# Altium PCB MS-002.24T003末端灯板PCB图 V1.0.PcbDoc
Units mil, origin at the board's own origin, x right, y up, seen from the top; angles counter-clockwise.
Board outline 2629.92 x 2629.92 mil, 2 copper layers (Top Layer, Bottom Layer), stack 61.756 mil thick; 61 components, 49 nets, 157 pads, 60 vias.
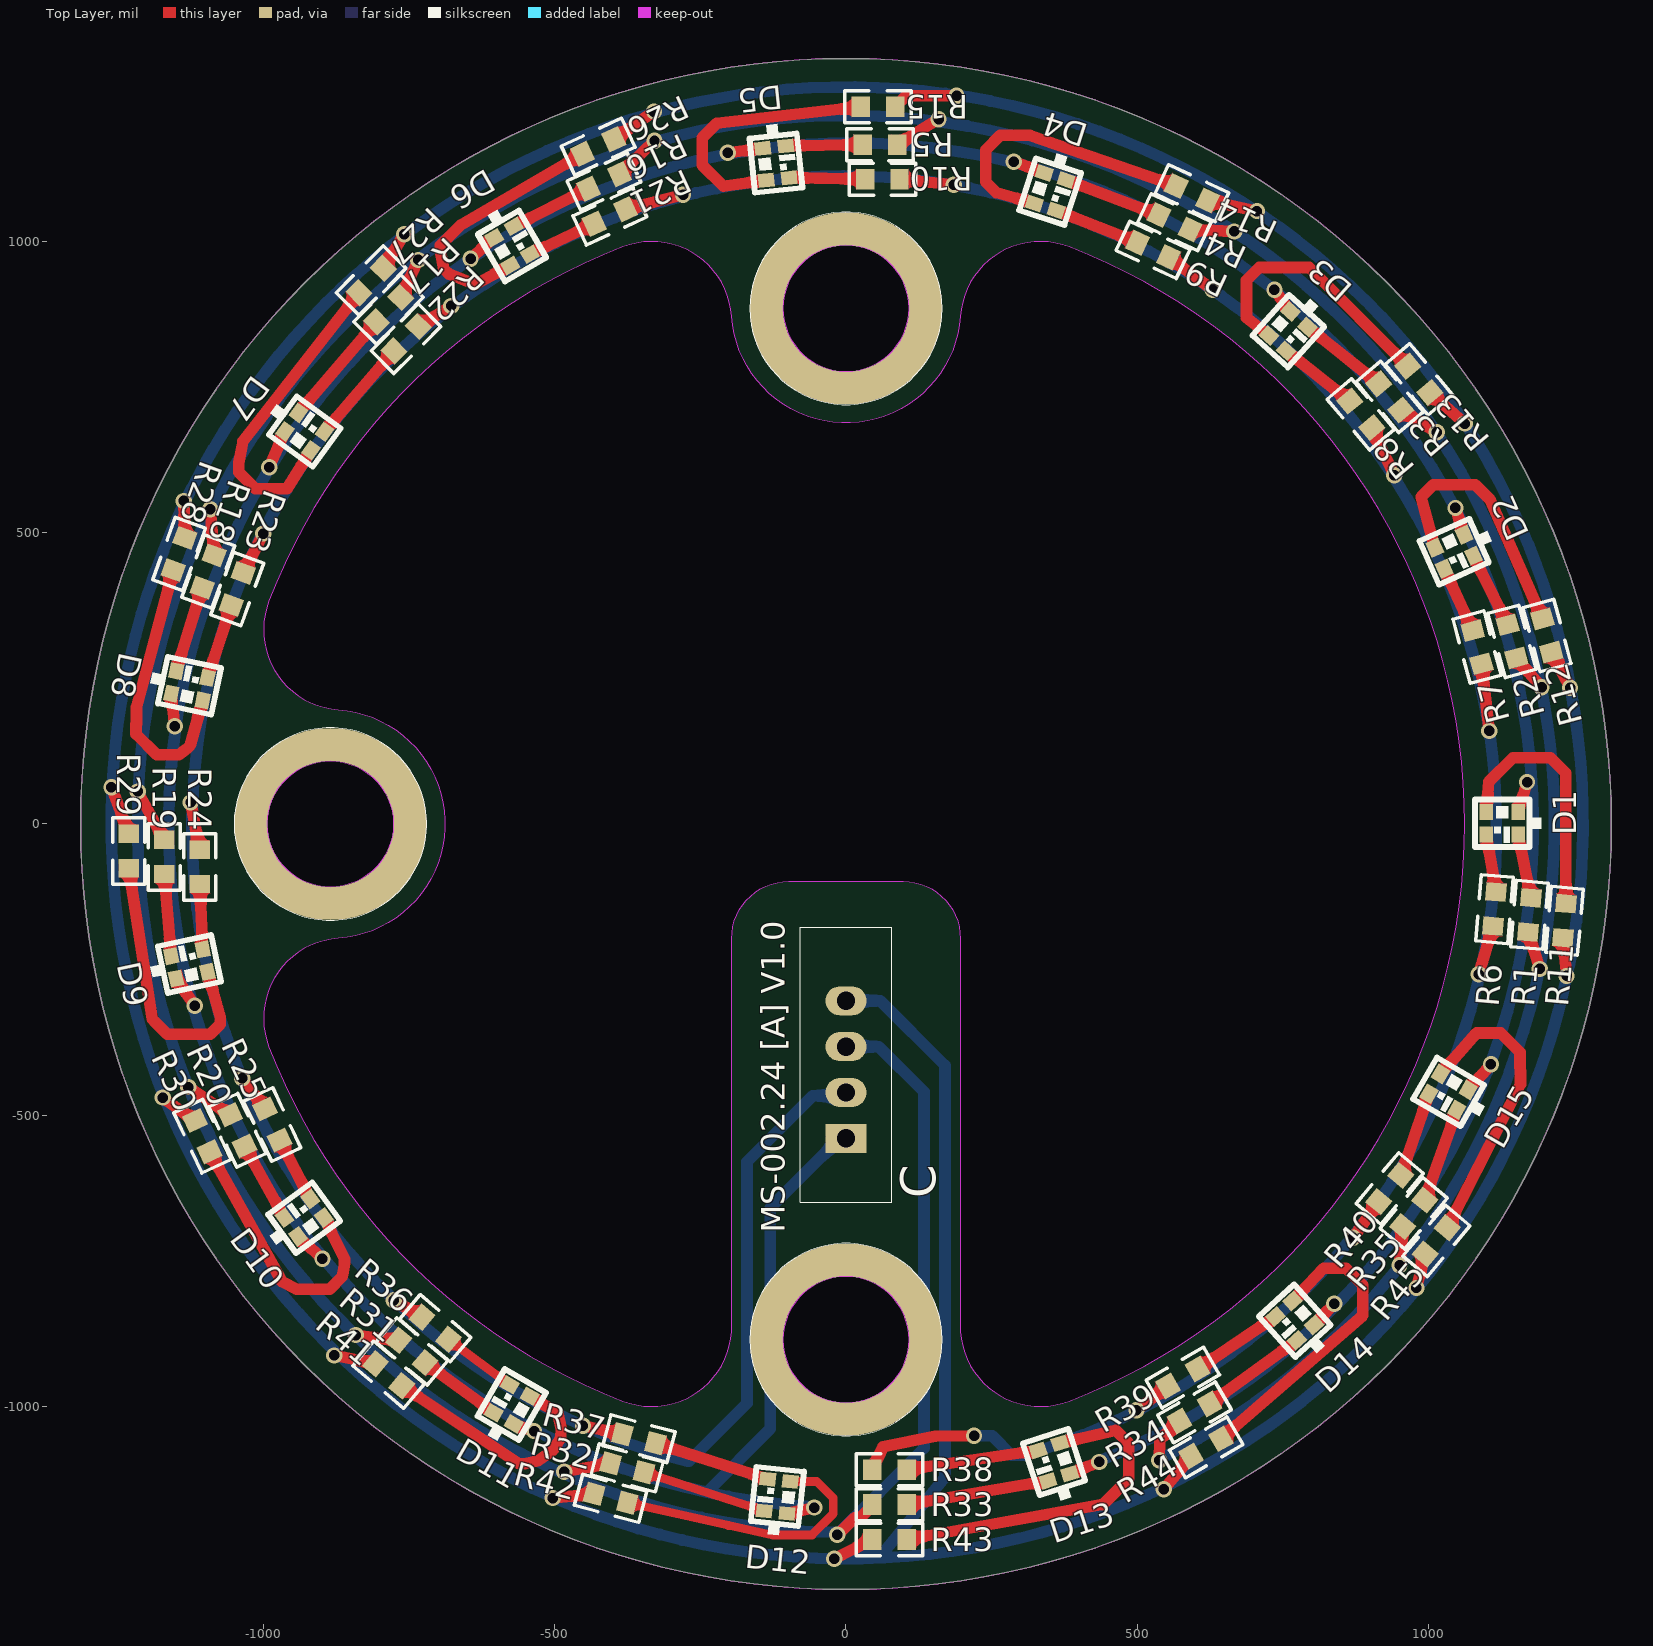
[diagram p0: Top Layer view]
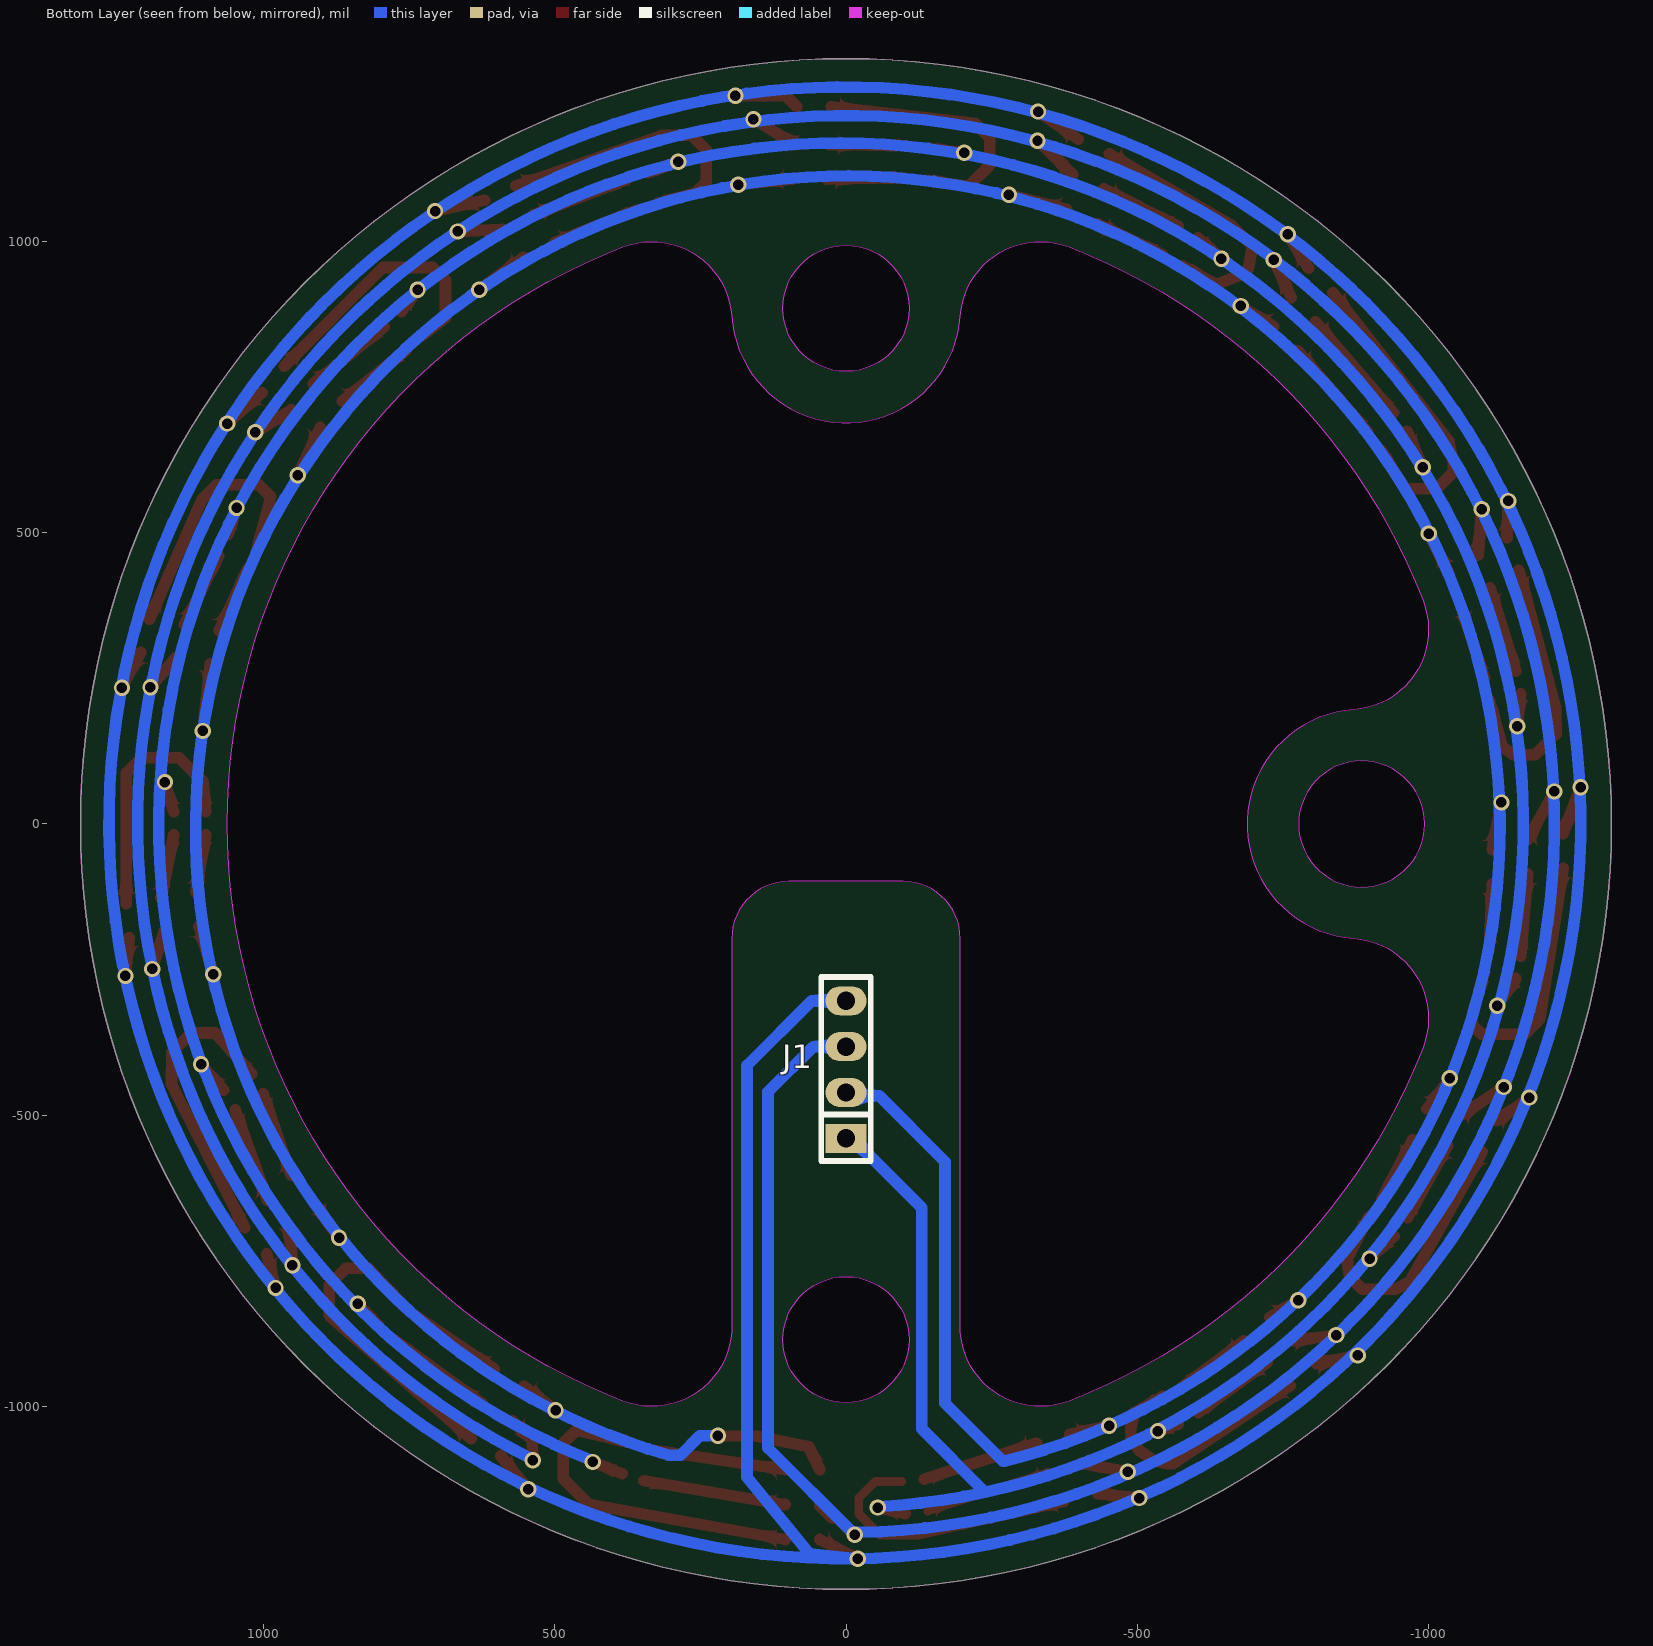
[diagram p1: Bottom Layer view, seen from below]
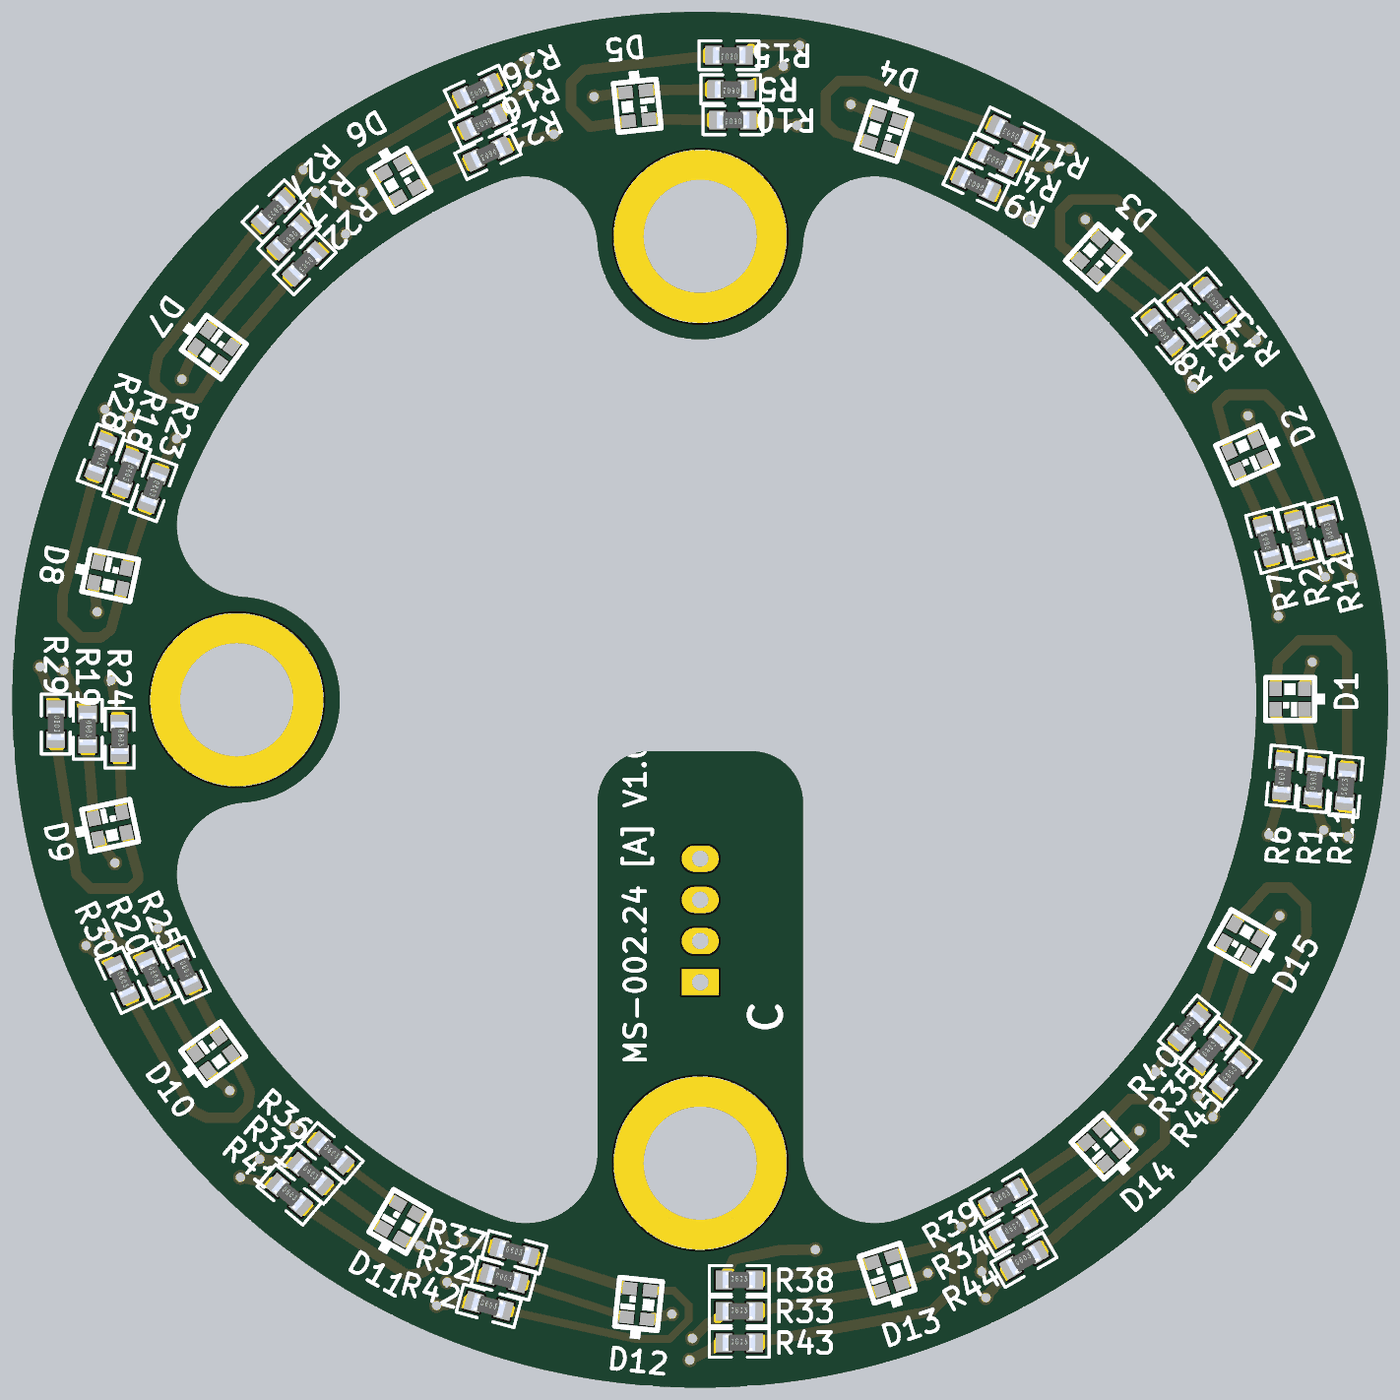
[diagram p2: 3D render of the assembled board from above, using the file's embedded part models]

## Layer stack, top to bottom
Top Solder: solder mask 1, SM-001, Dk 4
Top Layer: signal copper 1.378
Dielectric 1: core 59, Core-043, Dk 4.3
Bottom Layer: signal copper 1.378
Bottom Solder: solder mask 1, SM-001, Dk 4

## Board outline
-1314.96,0 ccw(c0,0) 0,-1314.96 ccw(c0,0) 1314.96,0 ccw(c0,0) 0,1314.96 ccw(c0,0)
cut-out: -991.37,-383.58 ccw(c0,0) -383.58,-991.37 ccw(c-333.86,-862.86) -196.39,-872.32 -196.39,-196.85 cw(c-97.96,-196.85) -97.96,-98.43 97.96,-98.43 cw(c97.96,-196.85) 196.39,-196.85 196.39,-872.32 ccw(c333.86,-862.86) 383.58,-991.37 ccw(c0,0) 383.58,991.37 ccw(c333.86,862.86) 196.39,872.32 cw(c0,885.83) -196.39,872.32 ccw(c-333.86,862.86) -383.58,991.37 ccw(c0,0) -991.37,383.58 ccw(c-862.86,333.86) -872.32,196.39 cw(c-885.83,0) -872.32,-196.39 ccw(c-862.86,-333.86)
cut-out: -108.27,885.83 ccw(c0,885.83) 0,777.56 ccw(c0,885.83) 108.27,885.83 ccw(c0,885.83) 0,994.09 ccw(c0,885.83)
cut-out: -108.27,-885.83 ccw(c0,-885.83) 0,-994.09 ccw(c0,-885.83) 108.27,-885.83 ccw(c0,-885.83) 0,-777.56 ccw(c0,-885.83)
cut-out: -994.09,0 cw(c-885.83,0) -885.83,108.27 cw(c-885.83,0) -777.56,0 cw(c-885.83,0) -885.83,-108.27 cw(c-885.83,0)

## Design rules (kind name [scope] priority, off if disabled: settings)
Clearance [All] p1: gap=8 ignorepadtopadclearanceinfootprint=FALSE
HoleSize [All] p1: absolutevalues=TRUE maxlimit=236.22 minlimit=1 maxpercent=80.000 minpercent=20.000
MinimumSolderMaskSliver [All] p1: minsoldermaskwidth=0
PlaneConnect [All] p1: pad.planeconnectstyle=Relief pad.reliefexpansion=20 pad.reliefentries=4 pad.reliefconductorwidth=10 pad.reliefairgap=10 via.planeconnectstyle=Direct via.reliefexpansion=20 via.reliefentries=4 via.reliefconductorwidth=10 via.reliefairgap=10
PolygonConnect [All] p1: thpad.connectstyle=Relief thpad.reliefconductorwidth=10 thpad.reliefentries=4 thpad.polygonreliefangle="90 Angle" thpad.airgapwidth=10 smdpad.connectstyle=Relief smdpad.reliefconductorwidth=10 smdpad.reliefentries=4 smdpad.polygonreliefangle="90 Angle" smdpad.airgapwidth=10 via.connectstyle=Direct via.reliefconductorwidth=10 via.reliefentries=4 via.polygonreliefangle="90 Angle" via.airgapwidth=10
RoomDefinition MS-002.24T002 [InComponentClass('MS-002.24T002')] p1: confinementstyle=ConfineOut formatcopy=TRUE lockcomponents=FALSE outline 304,-749 590,-749 590,-601.77 304,-601.77
RoutingVias [All] p1: holewidth=18 width=25 viastyle="Through Hole" minholewidth=18 minwidth=25 maxholewidth=28 maxwidth=50
SilkToSilkClearance [All] p1: silktosilkclearance=0
SilkToSolderMaskClearance [IsPad] p1: minsilkscreentomaskgap=0 clearancetoexposedcopper=TRUE
SolderMaskExpansion [IsVia] p1: expansion=4 istentingtop=TRUE
SolderMaskExpansion SolderMaskExpansion_1 [All] p2: expansion=4 istentingtop=FALSE
Width [All] p1: maxlimit=30 minlimit=10 preferedwidth=15
25 further rules are at their usual default settings.

## Components (designator, comment, footprint, x,y, rotation, side; value= is the part's Value field where it differs from the comment)
D1 "19-237A/BHR6GHC-A01/2T" 19-237A/BHR6GHC-A01/2T 1127.56,1.32 r0 top
D2 "19-237A/BHR6GHC-A01/2T" 19-237A/BHR6GHC-A01/2T 1044.82,467.77 r24 top
D3 "19-237A/BHR6GHC-A01/2T" 19-237A/BHR6GHC-A01/2T 759.93,846.69 r48 top
D4 "19-237A/BHR6GHC-A01/2T" 19-237A/BHR6GHC-A01/2T 350.8,1086.29 r72 top
D5 "19-237A/BHR6GHC-A01/2T" 19-237A/BHR6GHC-A01/2T -120.3,1135.47 r96 top
D6 "19-237A/BHR6GHC-A01/2T" 19-237A/BHR6GHC-A01/2T -573.83,993.03 r120 top
D7 "19-237A/BHR6GHC-A01/2T" 19-237A/BHR6GHC-A01/2T -929.87,674.27 r144 top
D8 "19-237A/BHR6GHC-A01/2T" 19-237A/BHR6GHC-A01/2T -1127.95,237.52 r168 top
D9 "19-237A/BHR6GHC-A01/2T" 19-237A/BHR6GHC-A01/2T -1128.05,-240.48 r192 top
D10 "19-237A/BHR6GHC-A01/2T" 19-237A/BHR6GHC-A01/2T -930.87,-676.27 r216 top
D11 "19-237A/BHR6GHC-A01/2T" 19-237A/BHR6GHC-A01/2T -574.27,-997.29 r240 top
D12 "19-237A/BHR6GHC-A01/2T" 19-237A/BHR6GHC-A01/2T -118,-1155 r264 top
D13 "19-237A/BHR6GHC-A01/2T" 19-237A/BHR6GHC-A01/2T 357.24,-1096.13 r288 top
D14 "19-237A/BHR6GHC-A01/2T" 19-237A/BHR6GHC-A01/2T 771.07,-853.31 r312 top
D15 "19-237A/BHR6GHC-A01/2T" 19-237A/BHR6GHC-A01/2T 1035.29,-460.27 r330 top
J1 "4PIN" SIP4_2.0 0,-540 r270 bottom
R1 "1k" 0603_R 1174.2,-156.21 r85 top
R2 "1k" 0603_R 1144.2,313.79 r105 top
R3 "1k" 0603_R 934.2,733.79 r130 top
R4 "1k" 0603_R 564.2,1033.79 r155 top
R5 "1k" 0603_R 58.5,1167 r180 top
R6 "1k" 0603_R 1114.2,-146.21 r85 top
R7 "1k" 0603_R 1084.2,303.79 r105 top
R8 "1k" 0603_R 884.2,703.79 r130 top
R9 "1k" 0603_R 527.46,986.26 r155 top
R10 "1k" 0603_R 62.5,1108 r180 top
R11 "1k" 0603_R 1234.2,-166.21 r85 top
R12 "1k" 0603_R 1204.2,323.79 r105 top
R13 "1k" 0603_R 984.2,763.79 r130 top
R14 "1k" 0603_R 594.2,1083.79 r155 top
R15 "1k" 0603_R 55,1232 r180 top
R16 "1k" 0603_R -415.8,1103.79 r205 top
R17 "1k" 0603_R -785.8,883.79 r225 top
R18 "1k" 0603_R -1095.8,433.79 r250 top
R19 "1k" 0603_R -1171,-56.5 r270 top
R20 "1k" 0603_R -1045.8,-526.21 r295 top
R21 "1k" 0603_R -405.8,1043.79 r205 top
R22 "1k" 0603_R -755.8,833.79 r225 top
R23 "1k" 0603_R -1045.8,403.79 r250 top
R24 "1k" 0603_R -1110,-73.5 r270 top
R25 "1k" 0603_R -985.8,-516.21 r295 top
R26 "1k" 0603_R -425.8,1163.79 r205 top
R27 "1k" 0603_R -815.8,933.79 r225 top
R28 "1k" 0603_R -1145.8,463.79 r250 top
R29 "1k" 0603_R -1232,-46.5 r270 top
R30 "1k" 0603_R -1105.8,-536.21 r295 top
R31 "1k" 0603_R -745.8,-906.21 r320 top
R32 "1k" 0603_R -375.8,-1106.21 r345 top
R33 "1k" 0603_R 74.7,-1169.21 r0 top
R34 "1k" 0603_R 598.65,-1010.96 r30 top
R35 "1k" 0603_R 975.24,-668.81 r50 top
R36 "1k" 0603_R -705.8,-866.21 r320 top
R37 "1k" 0603_R -355.8,-1056.21 r345 top
R38 "1k" 0603_R 74.7,-1109.21 r0 top
R39 "1k" 0603_R 578.65,-950.96 r30 top
R40 "1k" 0603_R 934.2,-626.21 r50 top
R41 "1k" 0603_R -785.8,-946.21 r320 top
R42 "1k" 0603_R -404.3,-1158.58 r345 top
R43 "1k" 0603_R 74.7,-1229.21 r0 top
R44 "1k" 0603_R 618.65,-1070.96 r30 top
R45 "1k" 0603_R 1014.2,-716.21 r50 top

## Footprints (in the part's own frame and the unit in brackets; to place one, negate y for a bottom-side part, rotate by r counter-clockwise, add the part's x,y. Pads: shape width x height; smd on the part's side, far side on the other; paste and mask are expansions set on the pad)
19-237A/BHR6GHC-A01/2T [mm] "RGB三色灯/共阳极"
  rect 0.6x0.7 smd paste+0 mask+0.051: 1(0.7,-0.5) 2(-0.7,-0.5) 3(0.7,0.5) 4(-0.7,0.5)
  silkscreen extent -1.19,-1.04 1.7,1.04
0603_R [mm]
  rect 0.8x0.9 smd: 1(-0.749,0) 2(0.749,0)
  silkscreen extent -1.45,-0.7 1.45,0.7, body extent -0.81,-0.4 0.79,0.4, height 0.42
SIP4_2.0 [mm]
  rect 1.27x1.8 hole 0.8: 1(0,0)
  oval 1.27x1.8 hole 0.8: 2(-2,0) 3(-4,0) 4(-6,0)
  silkscreen extent -7.04,-1.08 0.99,1.08

## Part data
D1 D2 D3 D4 D5 D6 D7 D8 D9 D10 D11 D12 D13 D14 D15: "RGB三色灯/共阳极"
R1 R2 R3 R4 R5 R6 R7 R8 R9 R10 R11 R12 R13 R14 R15 R16 R17 R18 R19 R20 R21 R22 R23 R24 R25 R26 R27 R28 R29 R30 R31 R32 R33 R34 R35 R36 R37 R38 R39 R40 R41 R42 R43 R44 R45: library part RES

## Free pads (board coordinates)
  round 330.71 / inner round 330.71 / far side round 0 hole 216.54: 3(-885.83,0) 3(0,-885.83) 3(0,885.83)

## Via types
v1: diameter 28, hole 18, Top Layer to Bottom Layer, tented both sides, 60 vias

## Nets (pads, with @x,y where several pads share a name; then routed paths per layer and width w, separated by ;. In a path a pad name is that pad's centre, name@x,y a point inside that pad or via, vN(x,y) a via of type N, cw(c..) or ccw(c..) an arc to the next point about the centre after c; other vN are vias at no path point)
B: J1.4 R11.1 R12.1 R13.1 R14.1 R15.1 R26.1 R27.1 R28.1 R29.1 R30.1 R41.1 R42.1 R43.1 R44.1 R45.1 | length 10255.9
  Top Layer w20: v1(-1262,63) R29.1 ; v1(-1174,-470) R30.1 ; v1(-1138,555) R28.1 ; v1(-879,-913) R41.1 ; R27.1 v1(-759,1013) ; v1(-504,-1158) R42.1 ; R26.1 v1(-330,1224) ; v1(-20,-1262.13) R43.1 ; R15.1 103.5,1251 v1(190,1251) ; v1(546,-1143) R44.1 ; R14.1 v1(706,1053) ; v1(980,-797) R45.1 ; R13.1 v1(1063,688) ; R12.1 v1(1244,234) ; R11.1 v1(1238,-261)
  Bottom Layer w20: v1(-20,-1262.13) 54.25,-1254.72 62.5,-1253.9 170,-1122.56 170,-415 58.78,-303.78 J1.4 ; 143.77,-1254.34 cw(c1.96,1.96) 143.93,-1254.32
G: J1.2 R6.1 R7.1 R8.1 R9.1 R10.1 R21.1 R22.1 R23.1 R24.1 R25.1 R36.1 R37.1 R38.1 R39.1 R40.1 | length 8680.9
  Top Layer w20: v1(-1126,37) R24.1 ; v1(-1037,-437) R25.1 ; R23.1 v1(-1001,499) ; v1(-777,-818) R36.1 ; R22.1 v1(-678,890) ; v1(-452,-1034) R37.1 ; R21.1 v1(-280,1081) ; R38.1 59.31,-1079.27 63.58,-1070.22 153.07,-1051.9 v1(220,-1051) v1@218.09,-1052.91 ; R10.1 v1(185,1098) ; v1(499,-1007) R39.1 ; R9.1 v1(630,918) ; v1(871,-711) R40.1 ; R8.1 v1(942,599) ; v1(1087,-258) R6.1 ; R7.1 v1(1105,159.83)
  Bottom Layer w20: J1.2 -5.74,-467 -57,-467 -170,-580 -170,-995 -269.74,-1094.74 -271.93,-1094.74 cw(c-3,-7) 305,-1084.33 284.33,-1084.33 251,-1051 v1(220,-1051)
NetD1_1: D1.1 R1.2 | length 110.6
  Top Layer w20: D1.1 R1.2
NetD1_2: D1.2 R6.2 | length 99.9
  Top Layer w20: D1.2 R6.2
NetD1_4: D1.4 R11.2 | length 436.6
  Top Layer w20: D1.4 1104.33,72.33 1146,114 1210.4,114 1236.77,87.63 R11.2
NetD2_1: D2.1 R2.2 | length 132.4
  Top Layer w20: D2.1 R2.2
NetD2_2: D2.2 R7.2 | length 117
  Top Layer w20: D2.2 R7.2
NetD2_4: D2.4 R12.2 | length 452.5
  Top Layer w20: D2.4 988,562 1009,583 1081,583 1107,557 R12.2
NetD3_1: D3.1 R3.2 | length 156.4
  Top Layer w20: D3.1 R3.2
NetD3_2: D3.2 R8.2 | length 139.3
  Top Layer w20: D3.2 R8.2
NetD3_4: D3.4 R13.2 | length 470.2
  Top Layer w20: D3.4 688,869.58 688,934 710,956 795.62,956 R13.2
NetD4_1: D4.1 R4.2 | length 170.4
  Top Layer w20: D4.1 R4.2
NetD4_2: D4.2 R9.2 | length 150.3
  Top Layer w20: D4.2 R9.2
NetD4_4: D4.4 R14.2 | length 501
  Top Layer w20: D4.4 258,1085 240,1103 240,1158 265,1183 316,1183 R14.2
NetD5_1: D5.1 R5.2 | length 132.6
  Top Layer w20: D5.1 R5.2
NetD5_2: D5.2 R10.2 | length 130.9
  Top Layer w20: D5.2 R10.2
NetD5_4: D5.4 R15.2 | length 457.4
  Top Layer w20: D5.4 -210.4,1095.4 -247,1132 -247,1179 -227.07,1198.93 -222,1204 R15.2
NetD6_1: D6.1 R16.2 | length 143.4
  Top Layer w20: D6.1 R16.2
NetD6_2: D6.2 R21.2 | length 122.2
  Top Layer w20: D6.2 R21.2
NetD6_4: D6.4 R26.2 | length 461.8
  Top Layer w20: D6.4 -636.94,927 -681.94,944.66 -690.74,953.47 -696.86,985.71 -696.58,994.42 -662.84,1028.16 R26.2
NetD7_1: D7.1 R17.2 | length 206
  Top Layer w20: D7.1 R17.2
NetD7_2: D7.2 R22.2 | length 183.1
  Top Layer w20: D7.2 R22.2
NetD7_4: D7.4 R27.2 | length 550.4
  Top Layer w20: D7.4 -960.44,576 -1015,576 -1042.57,603.57 -1043.22,604.29 -1043.22,620.78 -1035.94,657.28 R27.2
NetD8_1: D8.1 R18.2 | length 150.4
  Top Layer w20: D8.1 R18.2
NetD8_2: D8.2 R23.2 | length 131.6
  Top Layer w20: D8.2 R23.2
NetD8_4: D8.4 R28.2 | length 484.1
  Top Layer w20: R28.2 -1219,200.34 -1219,172 -1219.72,171.28 -1219.72,154.72 -1184,119 -1146.12,119 -1139.68,123.9 -1131.25,130.31 -1126.57,134.99 D8.4
NetD9_1: D9.1 R19.2 | length 141.5
  Top Layer w20: R19.2 D9.1
NetD9_2: D9.2 R24.2 | length 112.6
  Top Layer w20: R24.2 D9.2
NetD9_4: D9.4 R29.2 | length 490.1
  Top Layer w20: R29.2 -1192,-335 -1187.37,-339.63 -1166,-361 -1091.97,-361 -1074.83,-343.86 -1074.83,-332.82 -1096.88,-254.07 D9.4
NetD10_1: D10.1 R20.2 | length 141.4
  Top Layer w20: R20.2 D10.1
NetD10_2: D10.2 R25.2 | length 114.3
  Top Layer w20: R25.2 D10.2
NetD10_4: D10.4 R30.2 | length 481.3
  Top Layer w20: R30.2 -971.86,-781.17 -968.86,-786.57 -944,-799 -887,-799 -865.33,-777.33 -864.02,-769.38 -861.51,-754.1 -861.51,-747.79 D10.4
NetD11_1: D11.1 R31.2 | length 146.2
  Top Layer w20: R31.2 D11.1
NetD11_2: D11.2 R36.2 | length 131.6
  Top Layer w15: R36.2 D11.2
NetD11_4: D11.4 R41.2 | length 431.5
  Top Layer w20: R41.2 -561.88,-1099.12 -551.68,-1099.18 -529.09,-1094.22 -503.57,-1076.08 -489.84,-1053.96 -489.49,-1038.55 -494.86,-1011.9 D11.4
NetD12_1: D12.1 R32.2 | length 217.3
  Top Layer w15: R32.2 D12.1
NetD12_2: D12.2 R37.2 | length 202.2
  Top Layer w20: R37.2 D12.2
NetD12_4: D12.4 R42.2 | length 487.3
  Top Layer w15: R42.2 -201.7,-1205 -125.43,-1221.6 -117.6,-1221.6 -58.6,-1221.6 -22,-1185 -22,-1158 -50.35,-1129.65 D12.4
NetD13_1: D13.1 R33.2 | length 246.2
  Top Layer w20: R33.2 D13.1
NetD13_2: D13.2 R38.2 | length 228.2
  Top Layer w20: R38.2 D13.2
NetD13_4: D13.4 R43.2 | length 596.7
  Top Layer w20: R43.2 442,-1169 446.44,-1164.56 486,-1125 486,-1064 463.64,-1041.64 D13.4
NetD14_1: D14.1 R34.2 | length 186.1
  Top Layer w20: R34.2 D14.1
NetD14_2: D14.2 R39.2 | length 161.4
  Top Layer w20: R39.2 D14.2
NetD14_4: D14.4 R44.2 | length 532.4
  Top Layer w20: R44.2 777.41,-940.32 888,-844.11 888,-792 859,-763 821,-763 D14.4
NetD15_1: D15.1 R35.2 | length 164.6
  Top Layer w20: R35.2 D15.1
NetD15_2: D15.2 R40.2 | length 148.2
  Top Layer w20: R40.2 D15.2
NetD15_4: D15.4 R45.2 | length 514
  Top Layer w20: D15.4 1083.5,-359 1125,-359 1158,-392 1158,-400.78 1158.89,-441.96 1158.82,-447.18 R45.2
R: J1.3 R1.1 R2.1 R3.1 R4.1 R5.1 R16.1 R17.1 R18.1 R19.1 R20.1 R31.1 R32.1 R33.1 R34.1 R35.1 | length 9232.9
  Top Layer w20: v1(-1217,56) R19.1 ; v1(-1130,-452) R20.1 ; v1(-1092,541) R18.1 ; v1(-842,-878) R31.1 ; R17.1 v1(-735,969) ; v1(-484,-1113) R32.1 ; R16.1 v1(-329,1174) ; v1(-14.9,-1220.86) -13.98,-1220.86 15.22,-1191.66 24.72,-1191.66 45.2,-1171.18 R33.1 ; R5.1 v1(159,1211) ; v1(538,-1093) 539,-1058.32 545,-1052.31 R34.1 ; R4.1 v1(667,1018) ; v1(951,-758) R35.1 ; R3.1 v1(1015,673) ; R2.1 v1(1195,235) ; R1.1 v1(1192,-249)
  Bottom Layer w20: J1.3 56.52,-382.52 134,-460 134,-1071.96 v1(-14.9,-1220.86) -15.51,-1221.48 -16.76,-1221.48 -21.24,-1216.99 cw(c0,0) v1@538.03,-1091.8
VCC: D1.3 D2.3 D3.3 D4.3 D5.3 D6.3 D7.3 D8.3 D9.3 D10.3 D11.3 D12.3 D13.3 D14.3 D15.3 J1.1 | length 8396.5
  Top Layer w20: D8.3 v1(-1153,168) ; D9.3 v1(-1119,-312) ; v1(-991,613) D7.3 ; D10.3 v1(-899.42,-747.12) ; v1(-645,971) D6.3 ; D11.3 v1(-536,-1043) ; v1(-203,1153) D5.3 ; D12.3 v1(-54.3,-1174.42) v1@-56.47,-1174.42 ; v1(288,1138) D4.3 ; D13.3 v1(435,-1096) ; v1(736,918) D3.3 ; D14.3 v1(838.99,-823.99) v1@837,-822 ; v1(1047,543) D2.3 ; D15.3 v1(1108,-413) ; D1.3 v1(1170,72)
  Bottom Layer w20: v1(-54.3,-1174.42) -54.22,-1174.33 -54.22,-1172.85 cw(c8.55,-2.27) -238.75,-1148.15 ; J1.1 -10.43,-540 -130,-659.57 -130,-1039 -238.75,-1147.75 -238.75,-1148.15 ; v1@434.39,-1094.44 ccw(c8.55,-2.27) -238.75,-1148.15 ; v1(838.99,-823.99) 838.99,-825.67 v1@840.96,-827.63

## Keep-outs
Keep-Out Layer:
  circle w0.5: c0,0 r1314.96

## Silkscreen, mask and mechanical layers (free items; w line width, h text height)
Top Overlay:
  circle w0.5: c0,885.83 r165.35
  circle w0.5: c-885.83,0 r165.35
  circle w0.5: c0,-885.83 r165.35
  lines w0.5: -78.74,-649.61 78.74,-649.61 78.74,-177.17 -78.74,-177.17 -78.74,-649.61
  text "C" at 154,-643 h60 r90
  text "MS-002.24 [A] V1.0" at -104.9,-702 h40 r90
Mechanical 1:
  circle w0.5: c0,0 r1314.96
  lines w0.5: -991.37,-383.58 cw(c-862.86,-333.86) -872.32,-196.39 ccw(c-885.83,0) -872.32,196.39 cw(c-862.86,333.86) -991.37,383.58 cw(c0,0) -383.58,991.37 cw(c-333.86,862.86) -196.39,872.32 ccw(c0,885.83) 196.39,872.32 cw(c333.86,862.86) 383.58,991.37 cw(c0,0) 383.58,-991.37 cw(c333.86,-862.86) 196.39,-872.32 196.39,-196.85 ccw(c97.96,-196.85) 97.96,-98.43 -97.96,-98.43 ccw(c-97.96,-196.85) -196.39,-196.85 -196.39,-872.32 cw(c-333.86,-862.86) -383.58,-991.37 cw(c0,0) -991.37,-383.58
  lines w10: -1314.96,0 cw(c0,0) 0,1314.96 cw(c0,0) 1314.96,0 cw(c0,0) 0,-1314.96 cw(c0,0) -1314.96,0